# Allegro board PP001739.01.brd
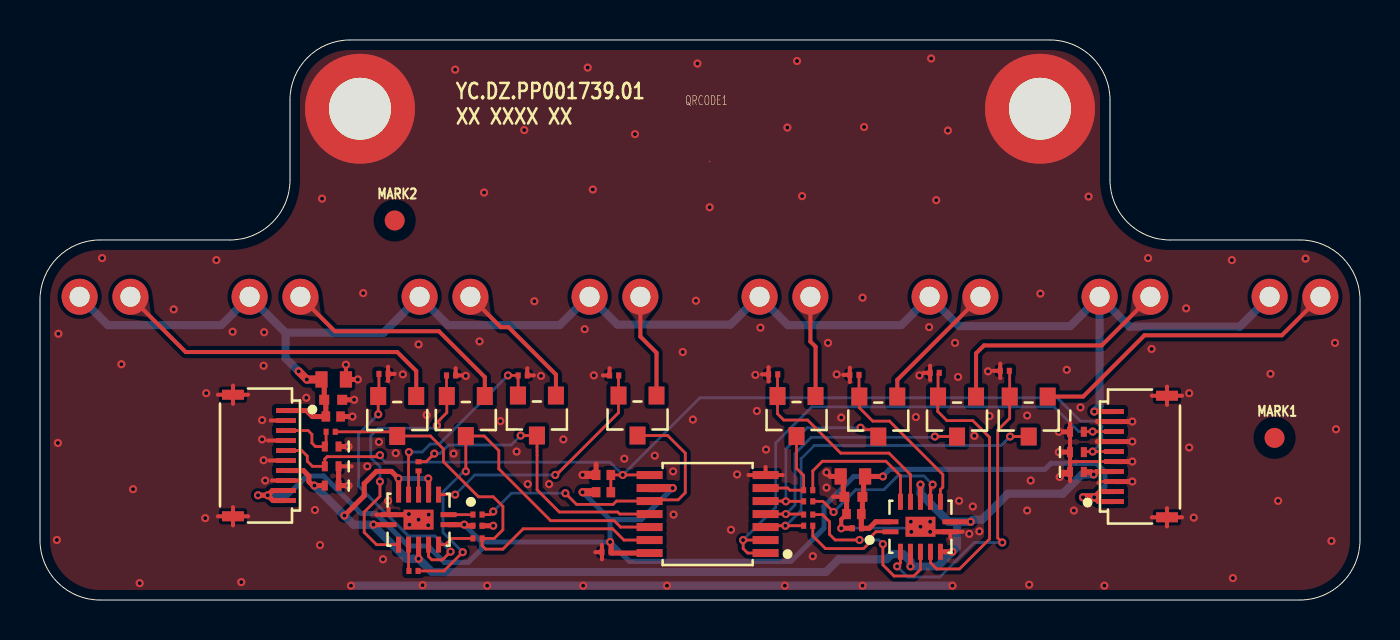
[diagram p0: board, top side]
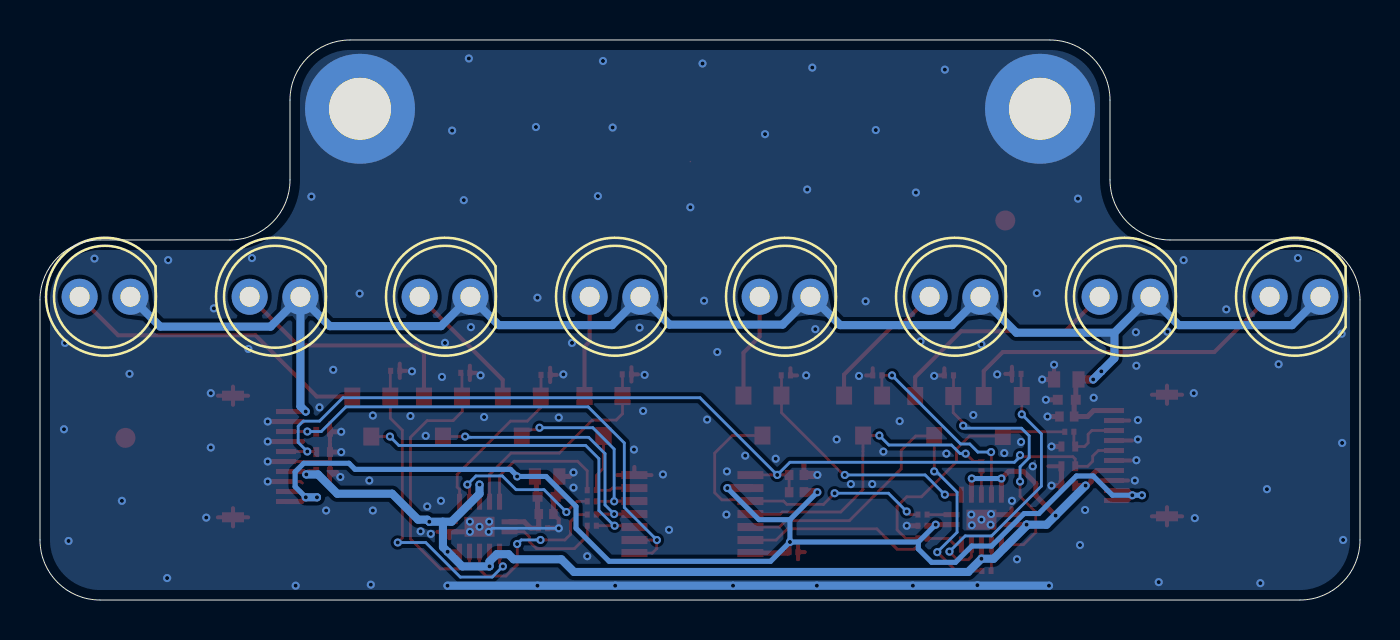
[diagram p1: board, bottom side, seen from below]

Outline 66 x 28 mm; copper layers: TOP, BOTTOM. Coordinates in mm from the lower left corner of the outline.
Outline path: 0,15 arc(0.88,17.13) 3,18 9.5,18 arc(11.62,18.88) 12.5,21 12.5,25 arc(13.38,27.13) 15.5,28 50.5,28 arc(52.62,27.13) 53.5,25 53.5,21 arc(54.38,18.88) 56.5,18 63,18 arc(65.12,17.13) 66,15 66,3 arc(65.12,0.88) 63,0 3,0 arc(0.88,0.88) 0,3 0,15

## Design rules (mm)
constraint set DEFAULT: min track width 0.14

## Placement (name value [footprint] x y rotation side)
C4  100.0nF  [C0201_A]  28.33 2.39 180 top
C8  100.0nF  [C0201_A]  21.87 3.71 180 top
C9  100.0nF  [C0201_A]  40.85 3.59 0 top
C10  4.7uF  [C0603_B]  14.69 11.03 0 top
C11  1.0uF  [C0402_B]  14.66 9.17 0 top
C12  100nF  [C0402]  14.66 10.01 0 top
C13  4.7uF  [C0603_B]  40.65 6.18 180 top
C14  1.0uF  [C0402_B]  40.7 4.3 180 top
C15  100nF  [C0402]  40.67 5.16 180 top
D1  SFH 203 FA  [D_5P9X5P5-9]  62.75 15.16 180 bottom
D2  SFH 203 FA  [D_5P9X5P5-9]  54.25 15.16 180 bottom
D3  SFH 203 FA  [D_5P9X5P5-9]  45.75 15.16 180 bottom
D4  SFH 203 FA  [D_5P9X5P5-9]  37.25 15.16 180 bottom
D5  SFH 203 FA  [D_5P9X5P5-9]  28.75 15.16 180 bottom
D6  SFH 203 FA  [D_5P9X5P5-9]  20.25 15.16 180 bottom
D7  SFH 203 FA  [D_5P9X5P5-9]  11.75 15.16 180 bottom
D8  SFH 203 FA  [D_5P9X5P5-9]  3.25 15.16 180 bottom
D9  PESD5V0F1BL  [SOD882_2-0P65-1P02X0P62-0P5]  51.85 6.41 180 top
D13  PESD5V0F1BL  [SOD882_2-0P65-1P02X0P62-0P5]  51.85 7.4 180 top
D14  PESD5V0F1BL  [SOD882_2-0P65-1P02X0P62-0P5]  14.58 7.68 0 top
D15  PESD5V0F1BL  [SOD882_2-0P65-1P02X0P62-0P5]  51.85 8.41 180 top
D16  PESD5V0F1BL  [SOD882_2-0P65-1P02X0P62-0P5]  14.58 6.69 0 top
D17  PESD5V0F1BL  [SOD882_2-0P65-1P02X0P62-0P5]  14.58 5.72 0 top
HOLE1  Hole  [HOLE_PC5P5DC3P1]  16 24.56 0 top
HOLE2  Hole  [HOLE_PC5P5DC3P1]  50 24.56 0 top
J1  503480-1000  [CON_10-0P5-6P7X3P6-1]  55.2 7.17 90 top
J2  503480-1000  [CON_10-0P5-6P7X3P6-1]  10.8 7.23 270 top
MARK1  T POINT R  [MARK_C1]  61.73 8.11 0 top
MARK2  T POINT R  [MARK_C1]  17.73 18.98 0 top
NOREF  -  []  51.85 8.42 0 top
NOREF#2  -  []  20.08 3.75 0 top
NOREF#3  -  []  25.47 0 90 top
NOREF#4  -  []  23.58 5.32 90 top
NOREF#5  -  []  9.65 4.18 90 top
NOREF#6  -  []  53.24 5.37 90 top
NOREF#7  -  []  17.95 4.92 90 top
NOREF#8  -  []  20.48 7.92 0 top
NOREF#9  -  []  0 -22.51 0 top
NOREF#10  -  []  9.65 10.27 0 top
NOREF#11  -  []  45.17 3.39 0 top
NOREF#12  -  []  45.08 4.56 90 top
NOREF#13  -  []  53.7 4.93 0 top
NOREF#14  -  []  56.35 4.13 90 top
NOREF#15  -  []  104.46 -90.01 90 top
NOREF#16  -  []  7.45 8.47 0 top
NOREF#17  -  []  53.7 4.93 90 top
NOREF#18  -  []  45.57 3.12 0 top
NOREF#19  -  []  8.84 5.42 90 top
NOREF#20  -  []  0 10.2 0 top
NOREF#21  -  []  12.3 8.98 90 top
NOREF#22  -  []  45.57 2.36 90 top
NOREF#23  -  []  43.04 4.56 90 top
NOREF#24  -  []  19.99 4.92 90 top
NOREF#25  -  []  20.78 3.74 0 top
NOREF#26  -  []  42.47 4.96 0 top
Q1  PMBT3904,215  [SOT-23_3-1P9-3X1P4-1P1]  49.43 9.17 180 top
Q2  PMBT3904,215  [SOT-23_3-1P9-3X1P4-1P1]  45.85 9.17 180 top
Q3  PMBT3904,215  [SOT-23_3-1P9-3X1P4-1P1]  41.92 9.17 180 top
Q4  PMBT3904,215  [SOT-23_3-1P9-3X1P4-1P1]  37.83 9.2 180 top
Q5  PMBT3904,215  [SOT-23_3-1P9-3X1P4-1P1]  29.88 9.23 180 top
Q6  PMBT3904,215  [SOT-23_3-1P9-3X1P4-1P1]  24.85 9.23 180 top
Q7  PMBT3904,215  [SOT-23_3-1P9-3X1P4-1P1]  21.29 9.2 180 top
Q8  PMBT3904,215  [SOT-23_3-1P9-3X1P4-1P1]  17.86 9.2 180 top
QRCODE1  T POINT R  [QRCODE_3P5X3P5]  33.48 21.93 0 top
R1  100.0R_NC  [R0402]  28.17 5.39 180 top
R2  100.0R_NC  [R0402]  28.17 6.25 0 top
R3  1.0KR  [R0201]  14.53 8.41 180 top
R4  2.2KR  [R0201]  48.24 11.46 0 top
R5  2.2KR  [R0201]  44.73 11.36 0 top
R6  2.2KR  [R0201]  40.72 11.26 0 top
R7  2.2KR  [R0201]  36.66 11.28 0 top
R8  2.2KR  [R0201]  28.71 11.23 0 top
R9  2.2KR  [R0201]  24.14 11.23 180 top
R10  2.2KR  [R0201]  20.55 11.23 180 top
R11  2.2KR  [R0201]  17.18 11.31 180 top
R12  1.0KR  [R0201]  38.41 3.71 0 top
R13  1.0KR  [R0201]  21.87 4.27 180 top
R14  1.0KR  [R0201]  38.41 4.27 0 top
R15  1.0KR  [R0201]  18.93 6.69 270 top
R16  1.0KR  [R0201]  38.41 4.93 0 top
R17  1.0KR  [R0201]  18.67 1.45 180 top
R18  1.0KR  [R0201]  38.41 5.49 0 top
R19  1.0KR  [R0201]  21.87 3.08 180 top
U1  74HC164PW  [SOP_14-0P65-5P1X4P5-1P2]  33.38 4.3 90 top
U2  74CBTLV3126BQ  [UQFN_15-0P5-3X2P5-1]  44.02 3.66 0 top
U3  74CBTLV3126BQ  [UQFN_15-0P5-3X2P5-1]  18.93 4.02 180 top

## Library data of the parts
C4 C8 C9 = C
C10-C15 = CAP NP
D1-D8 = DIODE PHOTO
D9 D13-D17 = PESD5V0F1BL
HOLE1 HOLE2 = Hole
J1 J2 = 503480-1000
MARK1 MARK2 QRCODE1 = T POINT R
Q1-Q8 = PMBT3904-215
R1-R19 = R
U1 = 74HC164PW
U2 U3 = 74CBTLV3126

## Footprints (pads in the part's own frame, mm; a bottom-side part is the same pattern mirrored in y, then rotated)
C0201_A
  rect 0.254x0.305 smd: 1(-0.229,0) 2(0.229,0)
C0402
  rect 0.5x0.5 smd: 1(-0.45,0) 2(0.45,0)
C0402_B
  rect 0.432x0.508 smd: 1(-0.369,0) 2(0.369,0)
C0603_B
  rect 0.61x0.813 smd: 1(-0.61,0) 2(0.61,0)
CON_10-0P5-6P7X3P6-1
  rect 0.25x1 smd: 1(-2.25,1.5) 2(-1.75,1.5) 3(-1.25,1.5) 4(-0.75,1.5) 5(-0.25,1.5) 6(0.25,1.5) 7(0.75,1.5) 8(1.25,1.5) 9(1.75,1.5) 10(2.25,1.5)
  rect 0.5x1.1 smd: 11(-3.04,-1.15) 12(3.04,-1.15)
D_5P9X5P5-9
  round 1.8 hole 1: A(-1.27,0) C(1.27,0)
HOLE_PC5P5DC3P1
  round 5.5 hole 3.1: 1(0,0)
MARK_C1
  round 1 smd: 1(0,0)
QRCODE_3P5X3P5
  round 0.076 smd: 1(0,0)
R0201
  rect 0.254x0.305 smd: 1(-0.229,0) 2(0.229,0)
R0402
  rect 0.432x0.508 smd: 1(-0.369,0) 2(0.369,0)
SOD882_2-0P65-1P02X0P62-0P5
  rect 0.3x0.5 smd: A(-0.345,0) C(0.345,0)
SOP_14-0P65-5P1X4P5-1P2
  rect 0.4x1.3 smd: 1(-1.95,-2.9) 2(-1.3,-2.9) 3(-0.65,-2.9) 4(0,-2.9) 5(0.65,-2.9) 6(1.3,-2.9) 7(1.95,-2.9) 8(1.95,2.9) 9(1.3,2.9) 10(0.65,2.9) 11(0,2.9) 12(-0.65,2.9) 13(-1.3,2.9) 14(-1.95,2.9)
SOT-23_3-1P9-3X1P4-1P1
  rect 0.8x0.9 smd: 1(-0.95,-1) 2(0.95,-1) 3(0,1)
UQFN_15-0P5-3X2P5-1
  rect 0.8x0.25 smd: 1(-1.5,-0.25) 7(1.5,-0.25) 8(1.5,0.25) 14(-1.5,0.25)
  rect 0.25x0.8 smd: 2(-1,-1.25) 3(-0.5,-1.25) 4(0,-1.25) 5(0.5,-1.25) 6(1,-1.25) 9(1,1.25) 10(0.5,1.25) 11(0,1.25) 12(-0.5,1.25) 13(-1,1.25)
  rect 1.5x1 smd: 15(0,0)

## Nets
GND: C4.2 C8.1 C9.1 C10.2 C11.2 C12.2 C13.2 C14.2 C15.2 D9.C D13.C D14.C D15.C D16.C D17.C HOLE1.1 HOLE2.1 J1.3 J1.5 J1.7 J1.9 J1.11 J1.12 J2.2 J2.4 J2.6 J2.8 J2.11 J2.12 QRCODE1.1(TP) R2.1 R4.1 R5.1 R6.1 R7.1 R8.1 R9.1 R10.1 R11.1 U1.7 U2.7 U2.15 U3.7 U3.15
VCC_3V3: C4.1 C8.2 C9.2 C13.1 C14.1 C15.1 J1.1 J1.2 J2.9 J2.10 R1.2 U1.9 U1.14(VCC) U2.14(VCC) U3.14(VCC)
VCC_5V: C10.1 C11.1 C12.1 D1.C(CATHODE) D2.C(CATHODE) D3.C(CATHODE) D4.C(CATHODE) D5.C(CATHODE) D6.C(CATHODE) D7.C(CATHODE) D8.C(CATHODE) J1.10 J2.1
ADC_BUS: D9.A D17.A J1.4 J2.7 U2.3 U2.6 U2.8 U2.11 U3.3 U3.6 U3.8 U3.11
Q0_OUT: Q1.2(EMITTER) R4.2 U2.2
Q1_OUT: Q2.2(EMITTER) R5.2 U2.5
Q2_OUT: Q3.2(EMITTER) R6.2 U2.9
Q3_OUT: Q4.2(EMITTER) R7.2 U2.12
Q4_OUT: Q5.2(EMITTER) R8.2 U3.2
Q5_OUT: Q6.2(EMITTER) R9.2 U3.5
Q6_OUT: Q7.2(EMITTER) R10.2 U3.9
Q7_OUT: Q8.2(EMITTER) R11.2 U3.12
RX_CLK: D13.A D16.A J1.6 J2.5 R1.1 R2.2 U1.8
RX_DATA: D15.A J1.8 U1.1 U1.2
RX_NEXT: D14.A J2.3 R3.2
RX_Q0: Q1.3 R12.1 U1.3
RX_Q1: Q2.3 R14.1 U1.4
RX_Q2: Q3.3 R16.1 U1.5
RX_Q3: Q4.3 R18.1 U1.6
RX_Q4: Q5.3 R13.1 U1.10
RX_Q5: Q6.3 R15.1 U1.11
RX_Q6: Q7.3 R17.1 U1.12
RX_Q7: Q8.3 R3.1 R19.1 U1.13
N16257454: D1.A Q1.1
N16452747: D2.A Q2.1
N16453008: D3.A Q3.1
N16453588: D5.A Q5.1
N16453714: D6.A Q6.1
N16453808: D4.A Q4.1
N16454193: D7.A Q7.1
N16454319: D8.A Q8.1
N16455437: R12.2 U2.1
N16455837: R14.2 U2.4
N16455841: R16.2 U2.10
N16455845: R18.2 U2.13
N16457218: R13.2 U3.1
N16457326: R15.2 U3.4
N16457330: R17.2 U3.10
N16457334: R19.2 U3.13

Pads without a net: MARK1 1; MARK2 1

## Via types
v1: diameter 0.406, hole 0.203, TOP to BOTTOM, 203 vias

## Routing (per net, layer and track width the routed paths; a pad name or vN(x,y) marks a point on that pad's centre or on a via; arc(x,y) is an arc through that point)
GND: length 87
  TOP w0.14: J1.3 52.97,5.93 52.89,5.85 ; 51.5,6.86 51.57,6.93 J1.5
  TOP w0.203: 51.5,8.87 D15.C 51.5,7.96 ; J2.12 9.65,4.64 ; J2.12 10.4,4.18 ; J2.12 9.65,3.73 ; J2.12 8.9,4.18 ; D16.C 15.58,6.69 ; 24.69,11.23 R9.1 24.36,11.59 ; 36.43,10.93 R7.1 ; R7.1 36.1,11.28 ; R7.1 36.43,11.64 ; 28.15,11.23 R8.1 28.48,11.59 ; 9.65,9.81 J2.11 ; J2.11 9.65,10.72 ; J2.11 8.9,10.27 ; J2.11 10.4,10.27 ; J2.2 11.54,8.98 ; 27.77,2.39 C4.2 ; C4.2 28.1,2.75 ; C4.2 28.1,2.04 ; 51.15,6.41 D9.C ; D9.C 51.5,5.95 ; D9.C 51.5,6.86 ; J2.6 11.48,6.98 ; 17.4,10.95 R11.1 ; R11.1 17.4,11.66 ; R11.1 17.74,11.31 ; 13,5.98 J2.8 11.6,5.98 ; J1.11 56.35,4.59 ; J1.11 57.1,4.13 ; J1.11 55.6,4.13 ; J1.11 56.35,3.68 ; 44.18,11.36 R5.1 ; R5.1 44.51,11 ; R5.1 44.51,11.72 ; J1.12 56.35,10.67 ; J1.12 57.1,10.22 ; J1.12 56.35,9.76 ; J1.12 55.6,10.22 ; 48.01,11.1 R4.1 ; R4.1 48.01,11.82 ; R4.1 47.68,11.46 ; 35.43,6.25 U1.7 ; U1.7 36.28,6.65 ; U1.7 37.13,6.25 ; 45.52,3.08 U2.7 46.13,3.41 ; 17.43,4.6 U3.7 16.82,4.27 ; C10.2 v1(15.3,11.77) ; v1(40.06,3.59) 40.06,4.03 C14.2 ; 40.16,11.26 R6.1 ; R6.1 40.49,11.61 ; R6.1 40.49,10.9 ; 51.5,7.85 D13.C 51.5,6.94 ; C15.2 39.65,5.16 ; 20.78,11.59 R10.1 21.11,11.23 ; J2.4 11.4,7.98
  TOP w0.254: U2.7 44.51,3.41 v1(44.51,3.41) ; R2.1 27.81,6.8 ; 52.87,8.93 J1.9 v1(54.62,8.93) ; C9.1 v1(40.06,3.59) ; D15.C v1(50.94,8.41) ; v1(39.32,6.38) 39.53,6.18 C13.2 40.16,6.05 40.16,5.22 C15.2 40.33,5.05 C14.2 ; D9.C 51.4,6.3 51.14,6.3 v1(50.98,6.15) ; C12.2 v1(15.71,10.01) ; D14.C v1(15.42,7.68) ; 52.87,7.93 J1.7 v1(54.62,7.93) ; D16.C D17.C v1(15.42,5.72) ; J1.5 v1(54.62,6.93) ; D13.C v1(50.94,7.4) ; C10.2 v1(15.89,11.03) ; U3.7 18.68,4.27 v1(18.93,4.02) ; C11.2 v1(15.62,9.17) ; J1.3 v1(54.62,5.93) ; C8.1 v1(22.66,3.71)
  TOP w0.406: R2.1 v1(27.13,6.25)
  BOTTOM w0.14: v1(40.06,3.59) 43.39,3.59 v1(43.57,3.41)
  BOTTOM w0.406: v1(45.62,0.72) v1(41.13,0.72) v1(37.24,0.72) v1(31.35,0.72) v1(27.16,0.72) v1(22.36,0.72) v1(15.55,0.72)
  vias: v1(0.84,3) v1(0.92,13.31) v1(0.89,7.85) v1(3.1,17.1) v1(4.07,11.79) v1(4.65,5.54) v1(4.98,0.84) v1(6.69,14.53) v1(8.31,10.34) v1(8.26,4.09) v1(8.82,17) v1(9.63,13.42) v1(10.06,0.89) v1(11.11,9) v1(11.11,8.03) v1(11.21,13.39) v1(11.18,11.71) v1(11.18,6.99) v1(11.26,5.97) v1(13.31,10.11) v1(13.75,4.5) v1(14,2.75) v1(14.1,20.07) v1(16.16,15.35) v1(16.36,6.69) v1(16.95,7.9) v1(17.15,2.04) v1(17.4,4.96) v1(17.79,7.35) v1(18.14,11.28) v1(18.45,4.3) v1(18.47,3.76) v1(18.93,12.78) v1(19.13,0.74) v1(19.33,9.25) v1(19.44,4.27) v1(19.41,3.74) v1(20.68,7.32) v1(20.76,26.52) v1(21.29,11.21) v1(21.98,12.93) v1(22.2,20.38) v1(23.02,8.95) v1(23.83,7.42) v1(24.21,23.5) v1(24.39,5.8) v1(24.72,14.94) v1(25.05,11.21) v1(25.46,5.8) v1(26.17,8.03) v1(27.23,13.54) v1(27.39,26.62) v1(27.64,20.53) v1(27.69,11.23) v1(29.22,7.07) v1(29.75,23.3) v1(30.74,7.22) v1(31.65,6.43) v1(31.68,4.27) v1(32.14,12.4) v1(32.64,9.02) v1(32.8,14.97) v1(32.87,26.83) v1(33.48,19.64) v1(34.55,3.51) v1(34.85,6.28) v1(35.77,11.26) v1(35.84,9.45) v1(36.02,13.62) v1(36.3,7.52) v1(37.37,23.63) v1(37.85,26.95) v1(38.11,20.2) v1(38.64,2.19) v1(39.32,5.62) v1(39.4,12.86) v1(39.83,11.28) v1(40.06,9.12) v1(41.13,15.12) v1(41.2,23.65) v1(43.54,3.92) v1(43.79,9.15) v1(43.97,11.23) v1(44.02,3.66) v1(44.46,13.65) v1(44.51,3.92) v1(44.56,27.08) v1(44.81,20) v1(45.4,23.47) v1(45.75,12.86) v1(45.9,11.16) v1(45.95,4.96) v1(46.46,3.31) v1(46.64,4.68) v1(46.72,8.21) v1(46.97,3.43) v1(47.4,11.44) v1(47.48,9.2) v1(49.36,9.23) v1(49.36,4.48) v1(49.54,5.97) v1(49.46,0.77) v1(50.02,15.32) v1(51.34,11.51) v1(51.69,4.48) v1(52.02,9.63) v1(52.43,20.17) v1(53.22,0.72) v1(55.4,17.1) v1(55.58,12.55) v1(57.31,14.58) v1(57.46,10.34) v1(57.46,7.63) v1(57.69,4.12) v1(59.59,17) v1(59.64,1.1) v1(61.52,11.31) v1(61.91,4.96) v1(63.28,17.07) v1(64.57,2.95) v1(64.75,12.86) v1(64.8,8.54)
VCC_3V3: length 74.5
  TOP w0.254: v1(11.38,5.24) v1(10.9,5.24) ; v1(11.38,5.24) 11.62,5.47 J2.9 ; v1(11.38,5.24) 11.65,4.98 J2.10 ; U3.14 v1(21.21,3.77) 21.27,3.71 C8.2 ; J1.1 52.92,4.93 v1(52.71,5.14) 53,5.42 J1.2 ; v1(28.5,2.9) 28.55,2.85 C4.1 28.6,2.35 U1.14 ; v1(42.14,6.18) C13.1 41.18,6.1 41.18,5.22 C15.1 41.12,4.35 C14.1 41.06,3.6 C9.2 41.46,3.59 41.78,3.91 U2.14
  TOP w0.406: U1.9 v1(31.63,5.6) ; v1(52.71,5.14) v1(52.15,5.14) ; R1.2 v1(27.13,5.39)
  BOTTOM w0.254: v1(28.5,2.9) 29.47,1.94 37.55,1.94 39.2,3.59 39.2,4.68 40.7,6.18 v1(42.14,6.18) 42.14,6.2 42.47,6.53 50.25,6.53 50.55,6.84 52.81,6.84 53.24,6.41 53.24,5.67 v1(52.71,5.14) ; v1(28.5,2.9) 28.5,4.02 ; v1(28.5,2.9) 22.08,2.9 ; 28.5,4.02 30.05,4.02 v1(31.63,5.6) ; 28.5,4.02 v1(27.13,5.39) ; v1(21.21,3.77) 22.08,2.9 ; 22.08,2.9 22.08,2.55 21.42,1.88 20.22,1.88 19.41,2.7 18.42,2.7 16.79,4.32 16.06,4.32 14.18,6.2 13.34,6.2 12.38,5.24 v1(11.38,5.24) v1(10.9,5.24)
  BOTTOM w0.406: v1(52.15,5.14) v1(52.71,5.14)
VCC_5V: length 83.1
  TOP w0.254: J1.10 v1(52.71,9.42) ; C10.1 14.21,10.89 C12.1 14.29,9.93 C11.1 13.62,9.17 13.32,9.47 J2.1
  TOP w0.406: C10.1 v1(13.34,11.03) v1(12.93,11.44)
  BOTTOM w0.406: D2.C 52.98,9.69 v1(52.71,9.42) ; D2.C 51.51,13.7 45.95,13.7 D3.C 43.06,13.75 37.4,13.75 D4.C 35.92,15.16 34.52,13.77 28.87,13.77 D5.C 27.41,15.16 25.99,13.75 20.4,13.75 D6.C 17.18,13.37 12.28,13.37 ; D2.C 54.47,13.67 59.99,13.67 D1.C ; 12.28,13.37 12.28,12.09 v1(12.93,11.44) v1(13.34,11.03) ; 12.28,13.37 D7.C 9.06,13.75 3.4,13.75 D8.C
ADC_BUS: length 63
  TOP w0.254: U2.8 v1(46.53,3.91) ; D9.A 52.56,6.41 v1(52.68,6.28) 52.83,6.42 J1.4 ; D17.A v1(13.72,5.72) 13.65,5.72 13.44,5.92 13.44,6.2 13.17,6.47 J2.7 ; U3.6 v1(17.93,6.08) 17.57,6.43 16.82,6.43 16.21,5.82 16.21,5.21 v1(15.22,4.22) ; U2.6 v1(45.62,2.41) ; U3.8 v1(16.67,3.77) ; U3.11 v1(18.93,2.06) ; v1(19.41,6.08) 19.43,6.06 U3.3 ; U2.11 v1(44.02,5.77) ; U2.3 v1(43.52,1.68)
  BOTTOM w0.254: v1(17.93,6.08) v1(19.41,6.08)
  BOTTOM w0.406: 45.85,3.91 45.42,3.91 44.02,5.31 v1(44.02,5.77) ; 45.85,3.91 v1(46.53,3.91) 46.64,4.02 47.1,4.02 48.39,5.31 51.14,5.31 52.1,6.28 v1(52.68,6.28) ; 45.85,3.91 45.85,2.65 v1(45.62,2.41) 44.89,1.68 v1(43.52,1.68) 43.52,1.93 43.16,2.29 42.58,2.29 42.32,2.04 39.93,2.04 39.3,1.4 19.59,1.4 v1(18.93,2.06) 18.32,2.06 16.67,3.71 v1(16.67,3.77) 16.67,3.76 15.68,3.76 v1(15.22,4.22) v1(13.72,5.72)
Q0_OUT: length 15.9
  TOP w0.14: U2.2 43.02,1.85 v1(42.86,1.68) ; v1(48.11,2.88) 47.88,3.1 47.88,8.49 48.48,9.09 Q1.2 48.48,11.45 R4.2
  BOTTOM w0.14: v1(48.11,2.88) 46.72,2.88 44.99,1.15 43.39,1.15 v1(42.86,1.68)
Q1_OUT: length 14.4
  TOP w0.14: U2.5 44.52,1.87 44.84,1.55 45.98,1.55 47.48,3.05 47.48,8.13 46.64,8.97 45.34,8.97 44.89,9.43 44.89,10.16 Q2.2 44.9,11.3 R5.2
Q2_OUT: length 8.6
  TOP w0.14: R6.2 40.95,10.19 Q3.2 40.97,9.62 41.64,8.95 42.47,8.95 45.14,6.28 45.14,5.64 45.02,5.53 U2.9
Q3_OUT: length 11.2
  TOP w0.14: R7.2 36.88,11.27 Q4.2 36.88,9.31 37.19,9 38.38,9 40.04,7.35 42.45,7.35 43.52,6.27 U2.12
Q4_OUT: length 12.6
  TOP w0.14: U3.2 v1(20.76,5.27) ; v1(25.76,6.25) 25.79,6.28 25.84,6.28 28.93,9.37 Q5.2 28.93,11.22 R8.2
  BOTTOM w0.14: v1(20.76,5.27) 21.74,6.25 v1(25.76,6.25)
Q5_OUT: length 10.2
  TOP w0.14: U3.5 18.43,7.38 v1(18.45,7.4) ; Q6.2 23.91,10.24 R9.2 v1(23.4,11.23)
  BOTTOM w0.14: v1(18.45,7.4) 19.11,7.4 19.51,7.8 19.97,7.8 v1(23.4,11.23)
Q6_OUT: length 13.6
  TOP w0.14: v1(19.84,8.72) 19.84,8.87 20.34,9.37 Q7.2 20.33,10.22 R10.2 ; U3.9 16.83,2.77 16.21,3.38 16.21,4.4 17,5.19 v1(17,5.92)
  BOTTOM w0.14: v1(17,5.92) 17,6.66 16.54,7.12 16.54,8.21 16.92,8.59 19.72,8.59 v1(19.84,8.72)
Q7_OUT: length 13.9
  TOP w0.14: U3.12 19.43,2.17 19.59,2.01 20.12,2.01 v1(20.53,2.42) ; R11.2 16.95,10.24 Q8.2 v1(16.91,9.29)
  BOTTOM w0.14: v1(16.91,9.29) 15.93,8.31 15.93,5.69 18.42,3.21 19.74,3.21 v1(20.53,2.42)
RX_CLK: length 50.1
  TOP w0.14: v1(17,7.24) 16.92,7.17 14.36,7.17 14.24,7.05 D16.A 13.62,6.69 13.37,6.94 13.37,7.19 13.08,7.47 J2.5 ; R1.1 R2.2 v1(29.14,6.25) 30.48,6.25 U1.8 ; D13.A 52.22,7.42 v1(52.63,7.42) J1.6
  BOTTOM w0.14: v1(52.63,7.42) 53.09,7.88 53.09,8.69 52.84,8.95 52.02,8.95 50.86,10.11 33,10.11 v1(29.14,6.25) 28.5,6.89 17.28,6.89 17,7.17 v1(17,7.24)
RX_DATA: length 26.9
  TOP w0.14: J1.8 v1(52.63,8.42) 52.2,8.42 D15.A ; U1.1 35.38,2.35 35.16,2.57 35.16,2.99 v1(35.15,3) U1.2
  BOTTOM w0.14: v1(35.15,3) 36.78,4.63 36.78,7.85 38.59,9.66 50.7,9.66 51.94,8.42 v1(52.63,8.42)
RX_NEXT: length 3.3
  TOP w0.14: J2.3 13.41,8.47 13.59,8.29 13.59,7.85 13.77,7.68 D14.A 14.31,7.74 R3.2
RX_Q0: length 17.5
  TOP w0.14: U1.3 36.35,3.71 v1(37.27,3.71) R12.1 ; Q1.3 v1(48.5,8.17)
  BOTTOM w0.14: v1(37.27,3.71) 37.29,3.71 38.05,4.48 38.05,7.07 38.71,7.73 48.06,7.73 v1(48.5,8.17)
RX_Q1: length 13.6
  TOP w0.14: Q2.3 v1(44.74,8.17) ; R14.1 38.16,4.3 v1(37.29,4.3) U1.4
  BOTTOM w0.14: v1(37.29,4.3) 37.75,4.76 37.75,7.32 38.56,8.13 44.7,8.13 v1(44.74,8.17)
RX_Q2: length 9.9
  TOP w0.14: v1(41.03,8.62) 41.13,8.51 41.78,8.51 41.92,8.37 Q3.3 ; U1.5 37.1,4.95 37.11,4.93 v1(37.29,4.93) R16.1
  BOTTOM w0.14: v1(41.03,8.62) 38.36,8.62 37.29,7.55 v1(37.29,4.93)
RX_Q3: length 4.8
  TOP w0.14: U1.6 37.39,5.6 37.5,5.49 R18.1 38.18,6.23 37.83,6.58 Q4.3
RX_Q4: length 15.8
  TOP w0.14: R13.1 22.51,4.27 v1(22.66,4.42) ; v1(26.27,5.34) 26.83,4.78 28.66,4.78 28.82,4.95 U1.10 30.54,5.01 31.91,5.01 32.26,5.36 32.26,7.35 31.38,8.23 Q5.3
  BOTTOM w0.14: v1(26.27,5.34) 23.58,5.34 v1(22.66,4.42)
RX_Q5: length 15.3
  TOP w0.14: v1(24.03,8.23) Q6.3 24.85,7.64 24.85,7.24 24.85,5.51 25.96,4.4 28.89,4.4 28.99,4.3 U1.11 ; R15.1 19.31,6.91 v1(19.72,7.32)
  BOTTOM w0.14: v1(24.03,8.23) 23.56,7.75 20.43,7.75 20,7.32 v1(19.72,7.32)
RX_Q6: length 21
  TOP w0.14: R17.1 20.2,1.45 v1(21.14,2.39) ; U1.12 29.03,3.65 28.71,3.97 25.53,3.97 22.94,6.56 22.94,7.47 22.21,8.2 Q7.3 v1(21.29,6.43)
  BOTTOM w0.14: v1(21.14,2.39) 20.15,3.38 20.15,5.39 21.19,6.43 v1(21.29,6.43)
RX_Q7: length 22.2
  TOP w0.14: R3.1 17.65,8.41 Q8.3 19.52,8.2 20.17,7.55 20.17,6.91 21.93,5.16 22.66,5.16 23.14,4.68 23.14,3.51 22.71,3.08 R19.1 22.1,2.72 22.28,2.55 23.14,2.55 24.16,3.56 28.63,3.56 29.19,3 U1.13
N16257454: length 15.7
  TOP w0.203: D1.A 62.09,13.24 55.22,13.24 52.16,10.17 Q1.1
N16452747: length 12
  TOP w0.203: D2.A 53.08,12.73 47.2,12.73 46.8,12.33 Q2.1
N16453008: length 6.7
  TOP w0.203: Q3.1 42.87,11.01 D3.A
N16453588: length 5.3
  TOP w0.203: Q5.1 30.83,12.36 30.02,13.17 D5.A
N16453714: length 6.9
  TOP w0.203: D6.A 23.04,13.65 23.42,13.65 25.8,11.27 Q6.1
N16453808: length 5.1
  TOP w0.203: D4.A 38.52,12.93 38.78,12.67 Q4.1
N16454193: length 11.8
  TOP w0.203: Q7.1 22.24,11.15 19.94,13.44 14.74,13.44 D7.A
N16454319: length 17.1
  TOP w0.203: D8.A 7.28,12.4 17.86,12.4 18.81,11.45 Q8.1
N16455437: length 5.1
  TOP w0.14: U2.1 41.79,3.41 41.53,3.15 41.53,2.93 41.18,2.57 39.27,2.57 38.64,3.21 R12.2
N16455837: length 8.7
  TOP w0.14: U2.4 44.02,1.53 43.69,1.2 42.7,1.2 42.14,1.76 v1(42.14,2.8) ; v1(40.98,3) 39.76,3 39.48,3.28 39.48,3.92 39.12,4.27 R14.2
  BOTTOM w0.14: v1(40.98,3) 41.94,3 v1(42.14,2.8)
N16455841: length 8
  TOP w0.14: R16.2 39.15,4.93 v1(39.68,4.4) ; U2.10 44.52,5.66 v1(44.63,5.77)
  BOTTOM w0.14: v1(44.63,5.77) 44.2,6.2 42.88,6.2 42.19,5.52 40.8,5.52 v1(39.68,4.4)
N16455845: length 7.2
  TOP w0.14: U2.13 43.02,6.21 42.3,6.94 39.12,6.94 38.64,6.46 R18.2
N16457218: length 1.2
  TOP w0.14: U3.1 21.64,4.27 R13.2
N16457326: length 1.2
  TOP w0.14: R15.2 U3.4
N16457330: length 1.3
  TOP w0.14: R17.2 18.43,1.47 U3.10
N16457334: length 1.8
  TOP w0.14: U3.13 20.27,2.77 20.58,3.08 R19.2

## Copper pours and planes (outline as drawn; the poured copper is in the pictures)
GND on TOP: 13.77,30.16 52.94,30.16 55.02,28.07 55.02,22.26 57,20.27 63.56,20.27 68.13,15.7 68.13,2.49 65.38,-0.25 1.02,-0.25 -1.21,1.99 -1.21,18.5 2.75,18.5 6.18,21.93 6.18,22.56 ; 9 cut-outs
GND on BOTTOM: 12.1,28.68 55.02,28.68 65.97,17.73 65.97,0.18 65.87,0.08 46.28,0.08 45.62,-0.58 1.55,-0.58 -1.09,2.06 -1.09,15.7 -0.88,15.7 ; 1 cut-out

Small or netless copper shapes (teardrops, artwork), in the pictures only: 73 on TOP, 63 on BOTTOM

## Text on the board
Ref Des/Silkscreen Top: YC.DZ.PP001739.01 | XX XXXX XX
DEVICE_TYPE_TOP: F
User.8: confidential | 0 | +0.10 | 0.10 | 14.51 | 8.50 | 12.75 | 59.50 | 7*12.75= | 6.40 | 1.00 | 0.16 | 1.60 | 3.44 | 6.56 | 3.40 | 37.40 | * | 9.40 | 16.00 | 3.50 | 0.075 | 34.00 | 37.50 | 6 | 10 | 9 | 11 | 1 | 2 | 3 | 4 | 13 | 14 | 5 | ` | 7 | 8 | 12 | 15 | 16 | 17 | 18
User.13: FIGURE | FINISHED_SIZE | 8.0 | 39.37 | 122.05 | DRILL CHART: TOP to BOTTOM | ALL UNITS ARE IN MILS | TOLERANCE_DRILL | +0.0/-0.0 | +3.0/-3.0 | PLATED | QTY | 203 | 16 | 2
